# Altium PCB Stack_Rduino-SAMD_V2-PRO_2021-01-03_21-25-19.pcbdoc
Units mm, origin at the board's own origin, x right, y up, seen from the top; angles counter-clockwise.
Board outline 69.99 x 44.68 mm, 2 copper layers (Top Layer, Bottom Layer); 66 components, 87 nets, 315 pads, 109 vias.
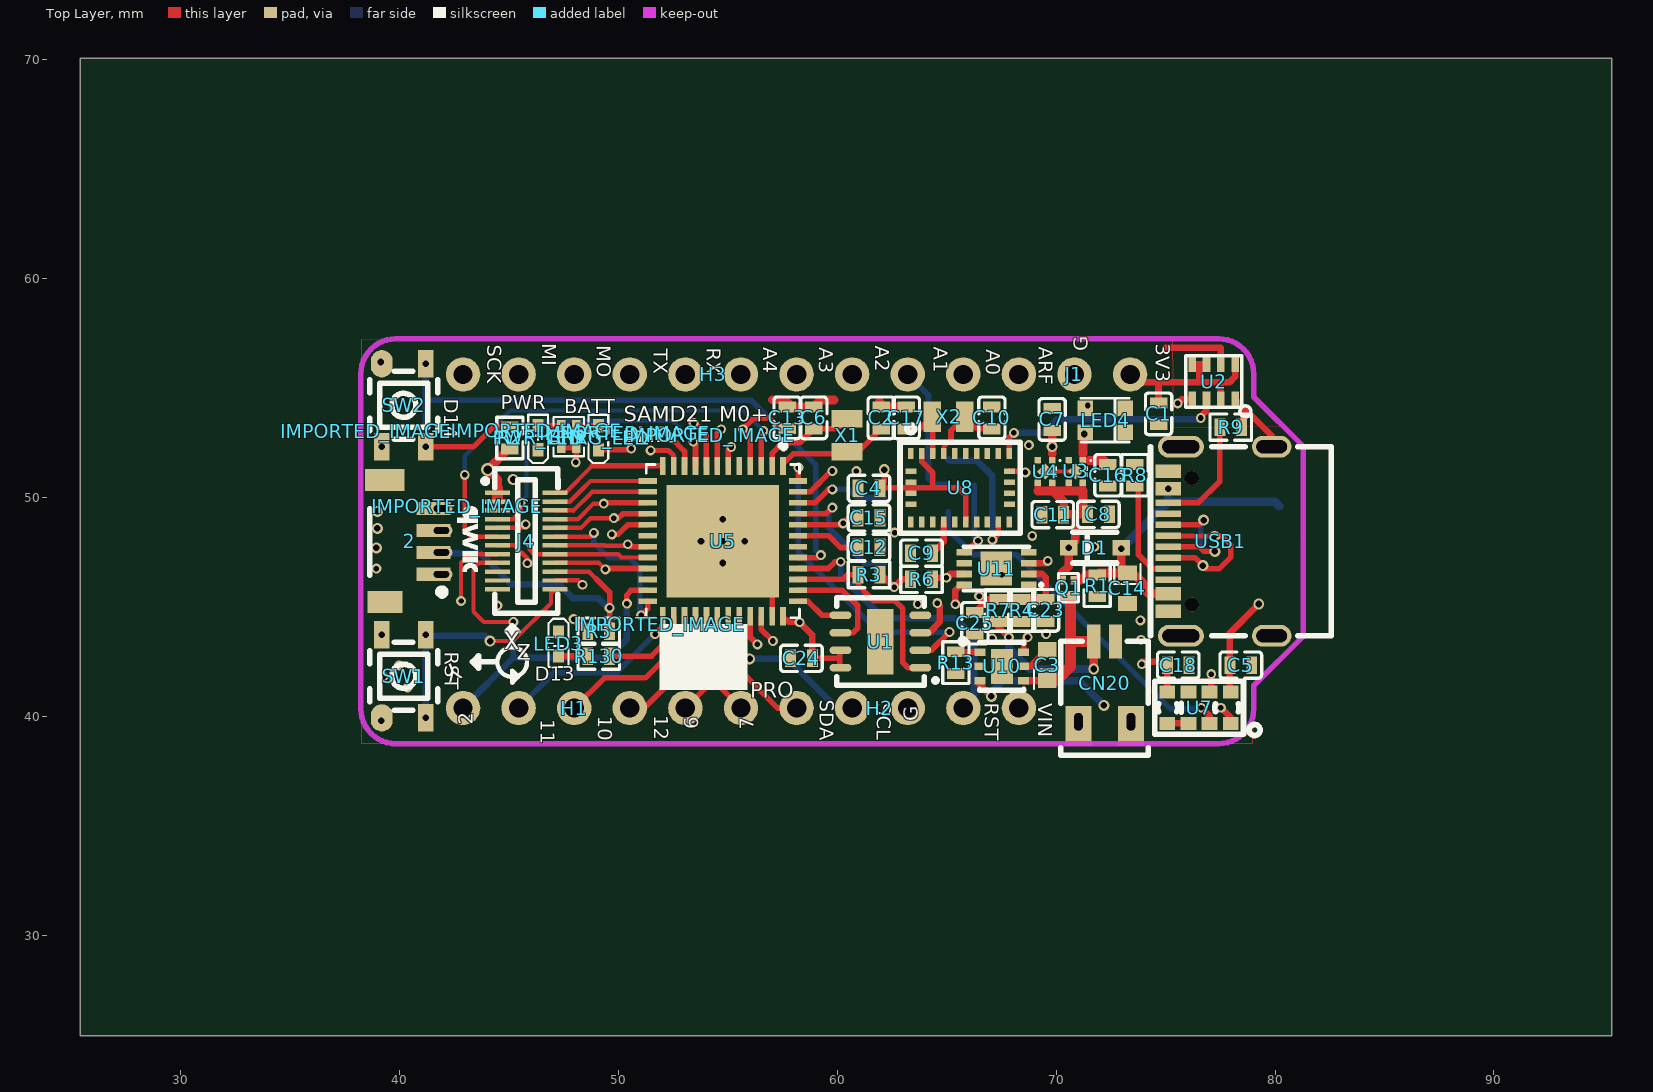
[diagram p0: Top Layer view]
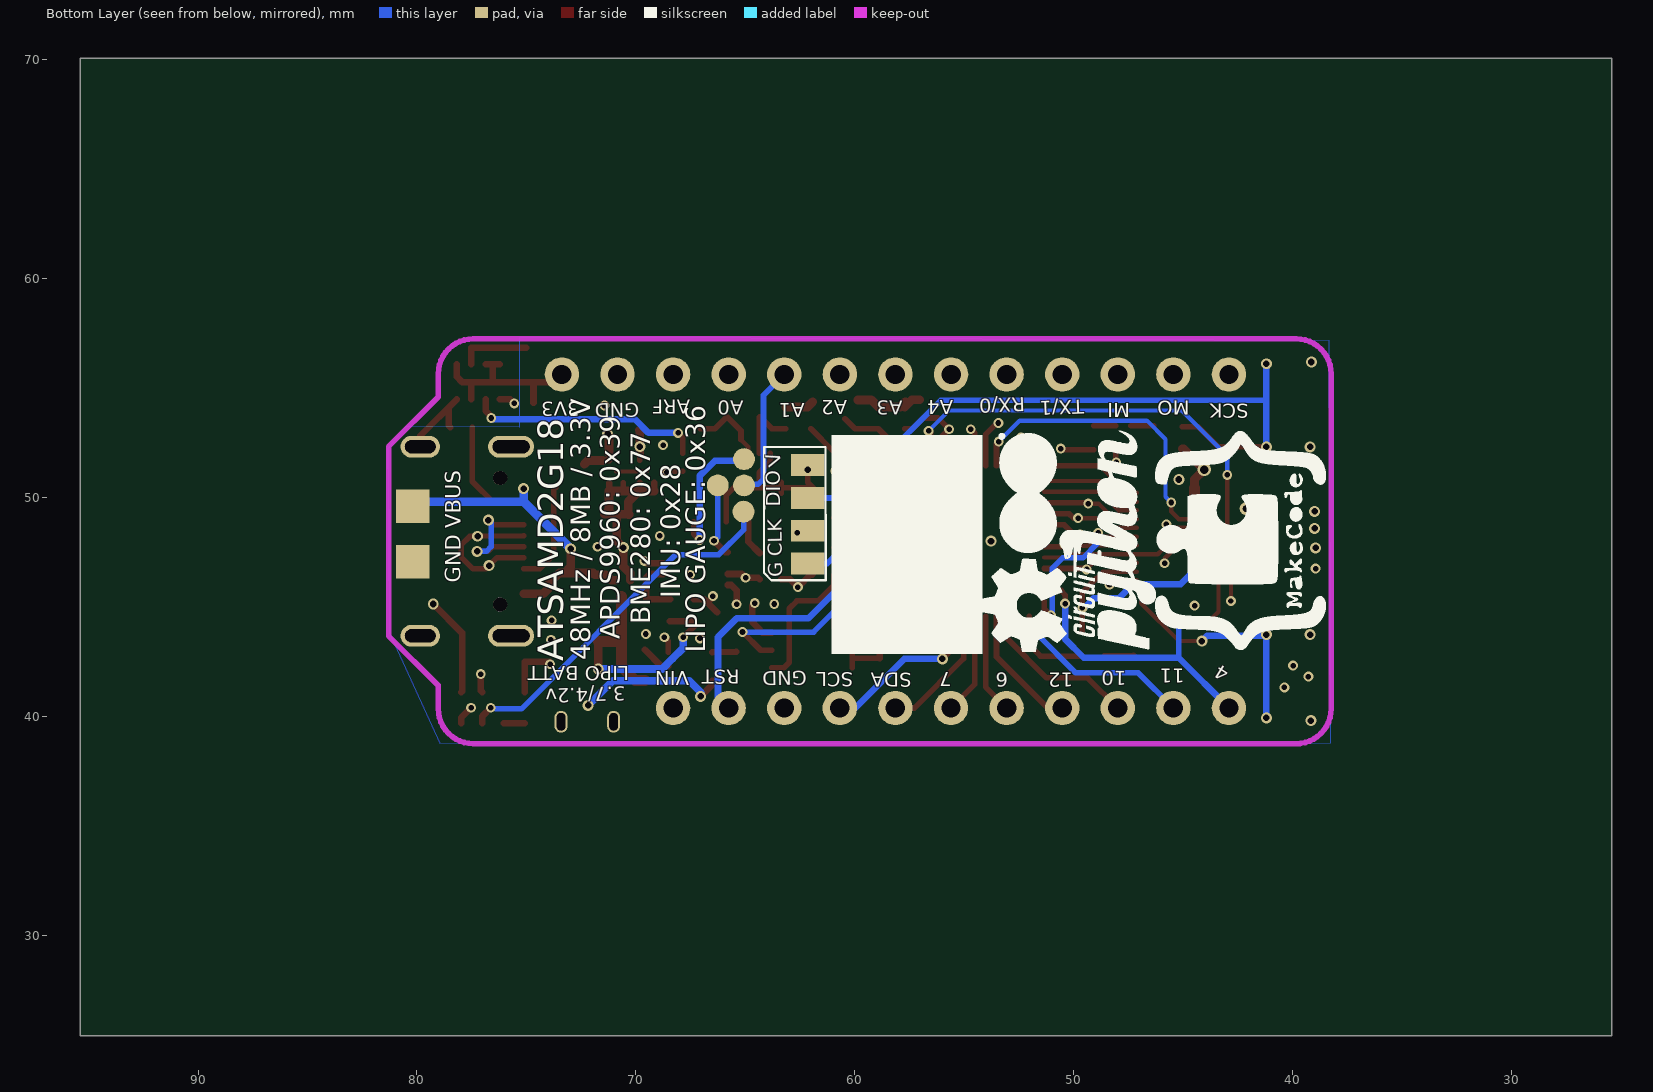
[diagram p1: Bottom Layer view, seen from below]

## Layer stack, top to bottom
Top Layer: signal copper (thickness not stored)
Dielectric: dielectric 0.32, FR-4, Dk 4.8
Bottom Layer: signal copper (thickness not stored)

## Board outline
95.394,25.4 25.4,25.4 25.4,70.076 95.394,70.076

## Components (designator, comment, footprint, x,y, rotation, side; value= is the part's Value field where it differs from the comment)
2 "JST_SH_4" JST_SH_4_SMD 40.237,48.109 r270 top
C1 "0.1uf" C0402 74.677,53.821 r270 top
C2 "22P" C0402 62.004,53.638 r270 top
C3 "10uF" C2012 69.587,42.341 r270 top
C4 "0.1uf" C0402 61.446,50.418 r0 top
C5 "1Uf" C0402 78.437,42.341 r0 top
C6 "22P" C0402 58.924,53.638 r90 top
C7 "1u" C0402 69.818,53.568 r90 top
C8 "1u" C0402 71.927,49.229 r0 top
C9 "0.1uf" C0402 63.847,47.461 r0 top
C10 "22P" C0402 67.064,53.638 r90 top
C11 "1u" C0402 69.845,49.217 r180 top
C12 "1u" C0402 61.447,47.714 r180 top
C13 "0.1u" C0402 57.707,53.639 r270 top
C14 "10uF" C2012 73.257,45.851 r90 top
C15 "10uf" C0402 61.447,49.064 r0 top
C16 "1u" C0402 72.362,51.016 r270 top
C17 "22P" C0402 63.154,53.638 r270 top
C18 "1Uf" C0402 75.577,42.341 r180 top
C23 "10Nf" C0402 69.517,44.841 r90 top
C24 "1uf" C0402 58.357,42.649 r180 top
C25 "1Uf" C0402 66.287,44.251 r270 top
CHRG_LED "Green" LED0402-RD 49.081,52.725 r90 top
CN20 "A1002WR-S-2P" CONN-SMD_A1002WR-S-2P 72.217,41.501 r0 top
D1 "B0540WS-7" "SOD-323 NARROW_L1.8-W1.3-LS2.5-RD" 71.769,47.706 r0 top
H1 "HDR-F-2.54_1x5" HDR-2.54_1X5 47.977,40.379 r180 top
H2 "HDR-F-2.54_1x6" HDR-2.54_1X6 61.949,40.379 r180 top
H3 "HDR-F-2.54_1x10" HDR-2.54_1X10 54.327,55.619 r0 top
IMPORTED_IMAGE "IMPORTED_IMAGE" IMPORTED_IMAGE 46.261,53.047 r0 top
IMPORTED_IMAGE "IMPORTED_IMAGE" IMPORTED_IMAGE 50.314,52.929 r0 top
IMPORTED_IMAGE "IMPORTED_IMAGE" IMPORTED_IMAGE 54.17,52.85 r0 top
IMPORTED_IMAGE "IMPORTED_IMAGE" IMPORTED_IMAGE 38.466,53.034 r0 top
IMPORTED_IMAGE "IMPORTED_IMAGE" IMPORTED_IMAGE 51.88,44.206 r0 top
IMPORTED_IMAGE "IMPORTED_IMAGE" IMPORTED_IMAGE 42.63,49.6 r0 top
J1 "HDR-M-2.54_1x3" HDR-M-2.54_1X3H 70.837,55.619 r0 top
J4 "DF40C-24DS-0.4V(51)" DF40C-24DS-0.4V(51) 45.789,48.008 r0 top
LED3 "BL-HB337A-AV-TRB" LED0402-RD 47.26,43.306 r270 top
LED4 "WS2812B-2020" WS2812B-2020 72.237,53.53 r0 top
PWR_LED "Red" LED0402-RD 46.325,52.73 r90 top
Q1 "LP0404N3T5G" SOT-883-3_L1.0-W0.6-BR 70.557,45.871 r90 top
R1 "100k" R0402 71.87,45.966 r90 top
R2 "10K" R0402 45.035,52.721 r90 top
R3 "10K" R0402 61.447,46.469 r0 top
R4 "150~180r" R0402 68.437,44.841 r270 top
R5 "10K" R0402 49.097,43.889 r0 top
R6 "10K" R0402 63.847,46.261 r180 top
R7 "1K" R0402 67.357,44.841 r270 top
R8 "5.1K" R0402 73.599,51.015 r90 top
R9 "5.1K" R0402 77.977,53.211 r180 top
R13 "2.2K" R0402 65.417,42.451 r270 top
R130 "1K" R0402 49.097,42.749 r180 top
RN1 "2k" RES-ARRAY-SMD_0402-4P-L1.0-W1.0-BL 47.725,52.781 r0 top
SW1 "K2-1177SW-D4DW-06-hany" KEY-SMD_K2-1177SW-HANY#1 40.187,41.829 r90 top
SW2 "K2-1177SW-D4DW-06-hany" KEY-SMD_K2-1177SW-HANY#2 40.187,54.209 r90 top
U1 "W25Q64JVIQ" "USON-8_L4.0-W4.0-P0.8-BL-EP - CUSTOM(4X3)" 61.969,43.418 r0 top
U2 "BME280" LGA-8_BME280 77.197,55.291 r270 top
U3 "NCP167AMX330TBG" DFN-4_L1.0-W1.0-P0.65-BL-EP 70.897,51.186 r180 top
U4 "NCP167AMX330TBG" DFN-4_L1.0-W1.0-P0.65-BL-EP 69.492,51.186 r180 top
U5 "ATSAMD21G18_QFN" QFN50P700X700X90-49N 54.771,48.004 r270 top
U7 "APDS-9960" SENSORS-SMD_APDS-9960 76.527,40.391 r270 top
U8 "BNO055" LGA-28_L5.2-W3.8-P0.50-BL 65.614,50.448 r270 top
U10 "LP4055QVF" TDFN-6_L2.0-W2.0-P0.65-TL-EP 67.517,42.281 r0 top
U11 "MAX17043" TDFN-8-EP-2MMX3MM 67.267,46.751 r180 top
USB1 "TYPE-C16PIN" USB-C-SMD_TYPE-C16PIN 77.487,47.999 r90 top
X1 "32.768KHz" FC--12M_L2.0-W1.2 60.444,52.848 r90 top
X2 "32.768KHz" FC--12M_L2.0-W1.2 65.084,53.688 r180 top

## Footprints (in the part's own frame and the unit in brackets; to place one, negate y for a bottom-side part, rotate by r counter-clockwise, add the part's x,y. Pads: shape width x height; smd on the part's side, far side on the other; paste and mask are expansions set on the pad)
C0402 [mm]
  rect 0.5x0.8 smd: 1(-0.5,0) 2(0.5,0)
  silkscreen extent -0.95,-0.6 0.95,0.6
C2012 [mm]
  rect 0.7x0.85 smd: 1(0.7,0) 2(-0.7,0)
  silkscreen extent 0.2,-0.6 1.1,0.6
CONN-SMD_A1002WR-S-2P [mm]
  rect 0.6x1.55 smd: 1(-0.498,1.924) 2(0.501,1.924)
  rect 1.199x1.798 smd: 3(1.201,-1.924)
  rect 1.201x1.798 smd: 4(-1.201,-1.924)
  silkscreen extent -2,-3.27 2,1.92
DF40C-24DS-0.4V(51) [mm]
  rect 1.14x0.2 smd: 1(-1.32,2.2) 2(1.32,2.2) 3(-1.32,1.8) 4(1.32,1.8) 5(-1.32,1.4) 6(1.32,1.4) 7(-1.32,1) 8(1.32,1) 9(-1.32,0.6) 10(1.32,0.6) 11(-1.32,0.2) 12(1.32,0.2) 13(-1.32,-0.2) 14(1.32,-0.2) 15(-1.32,-0.6) 16(1.32,-0.6) 17(-1.32,-1) 18(1.32,-1) 19(-1.32,-1.4) 20(1.32,-1.4) 21(-1.32,-1.8) 22(1.32,-1.8) 23(-1.32,-2.2) 24(1.32,-2.2)
  silkscreen extent -1.98,-3.3 1.45,3.3
DFN-4_L1.0-W1.0-P0.65-BL-EP [mm]
  rect 0.3x0.3 smd: 1(-0.325,-0.508) 2(0.325,-0.508) 3(0.325,0.508) 4(-0.325,0.508)
  rect 0.52x0.52 smd rot 135: 5(0,0)
  silkscreen extent -0.69,-0.51 0.5,0.21
FC--12M_L2.0-W1.2 [mm]
  rect 0.8x1.4 smd: 1(-0.75,0) 2(0.75,0)
HDR-2.54_1X5 [mil]
  round 62 hole 35: 1(-200,0) 2(-100,0) 3(0,0) 4(100,0) 5(200,0)
HDR-2.54_1X6 [mil]
  round 62 hole 35: 1(-250,0) 2(-150,0) 3(-50,0) 4(50,0) 5(150,0) 6(250,0)
HDR-2.54_1X10 [mil]
  round 62 hole 35: 1(-450,0) 2(-350,0) 3(-250,0) 4(-150,0) 5(-50,0) 6(50,0) 7(150,0) 8(250,0) 9(350,0) 10(450,0)
HDR-M-2.54_1X3H [mil]
  round 62 hole 35: 1(-100,0) 2(0,0) 3(100,0)
IMPORTED_IMAGE [mm]
JST_SH_4_SMD [mm]
  rect 0.6x1.55 smd: 1(1.62,1.315) 2(0.62,1.315) 3(-0.38,1.315) 4(-1.38,1.315)
  rect 1x1.8 smd: P$1(-2.68,-0.91)
  rect 1x1.6 smd: P$2(2.888,-0.91)
  silkscreen extent -1.38,-1.61 2.53,1.8
KEY-SMD_K2-1177SW-HANY#1 [mm]
  oval 1.249x1 smd: 1(-1.9,1.001)
  rect 1.25x0.7 smd: 2(1.9,1.001)
  rect 1.25x0.701 smd: 3(-1.9,-1) 4(1.9,-1)
  silkscreen extent -1.55,-1.55 1.55,1.55
KEY-SMD_K2-1177SW-HANY#2 [mm]
  rect 1.25x0.7 smd: 1(-1.9,1.001)
  oval 1.249x1 smd: 2(1.9,1.001)
  rect 1.25x0.701 smd: 3(-1.9,-1) 4(1.9,-1)
  silkscreen extent -1.55,-1.55 1.55,1.55
LED0402-RD [mm]
  rect 0.6x0.5 smd: 1(-0.55,0) 2(0.55,0)
  silkscreen extent -1.15,-0.45 1.05,0.45
LGA-8_BME280 [mil]
  rect 27.56x13.8 smd: 1(31.5,38.6) 2(31.5,13) 3(31.5,-13) 4(31.5,-38.6) 5(-31.5,-38.6) 6(-31.5,-13) 7(-31.5,13) 8(-31.5,38.6)
  silkscreen extent -46,-50 63,67
LGA-28_L5.2-W3.8-P0.50-BL [mm]
  rect 0.5x0.25 smd: 1(-1.563,-2.25) 6(1.563,-2.25) 7(1.563,-1.752) 8(1.563,-1.252) 9(1.563,-0.752) 10(1.563,-0.252) 11(1.563,0.248) 12(1.563,0.748) 13(1.563,1.248) 14(1.563,1.748) 15(1.563,2.248) 20(-1.563,2.248) 21(-1.563,1.748) 22(-1.563,1.248) 23(-1.563,0.748) 24(-1.563,0.248) 25(-1.563,-0.252) 26(-1.563,-0.752) 27(-1.563,-1.252) 28(-1.563,-1.752)
  rect 0.25x0.5 smd: 2(-0.749,-2.25) 3(-0.249,-2.25) 4(0.251,-2.25) 5(0.751,-2.25) 16(0.75,2.25) 17(0.25,2.25) 18(-0.25,2.25) 19(-0.75,2.25)
  silkscreen extent -2.87,-2.75 2.08,2.75
QFN50P700X700X90-49N [mm]
  rect 0.84x0.26 smd: 1(-3.435,2.75) 2(-3.435,2.25) 3(-3.435,1.75) 4(-3.435,1.25) 5(-3.435,0.75) 6(-3.435,0.25) 7(-3.435,-0.25) 8(-3.435,-0.75) 9(-3.435,-1.25) 10(-3.435,-1.75) 11(-3.435,-2.25) 12(-3.435,-2.75) 25(3.435,-2.75) 26(3.435,-2.25) 27(3.435,-1.75) 28(3.435,-1.25) 29(3.435,-0.75) 30(3.435,-0.25) 31(3.435,0.25) 32(3.435,0.75) 33(3.435,1.25) 34(3.435,1.75) 35(3.435,2.25) 36(3.435,2.75)
  rect 0.26x0.84 smd: 13(-2.75,-3.435) 14(-2.25,-3.435) 15(-1.75,-3.435) 16(-1.25,-3.435) 17(-0.75,-3.435) 18(-0.25,-3.435) 19(0.25,-3.435) 20(0.75,-3.435) 21(1.25,-3.435) 22(1.75,-3.435) 23(2.25,-3.435) 24(2.75,-3.435) 37(2.75,3.435) 38(2.25,3.435) 39(1.75,3.435) 40(1.25,3.435) 41(0.75,3.435) 42(0.25,3.435) 43(-0.25,3.435) 44(-0.75,3.435) 45(-1.25,3.435) 46(-1.75,3.435) 47(-2.25,3.435) 48(-2.75,3.435)
  rect 5.15x5.15 smd: 49(0,0)
  silkscreen extent -4.45,-3.5 3.5,3.5
R0402 [mm]
  rect 0.5x0.8 smd: 1(-0.5,0) 2(0.5,0)
  silkscreen extent -0.95,-0.6 0.95,0.6
RES-ARRAY-SMD_0402-4P-L1.0-W1.0-BL [mm]
  rect 0.389x0.5 smd: 1(-0.35,-0.5) 2(0.35,-0.5) 3(0.35,0.5) 4(-0.35,0.5)
  silkscreen extent -0.7,-0.9 0.7,0.9
SENSORS-SMD_APDS-9960 [mil]
  rect 23.6x28.3 smd: 1(28,57) 2(28,19) 3(28,-19) 4(28,-57) 5(-28,-57) 6(-28,-19) 7(-28,19) 8(-28,57)
  silkscreen extent -48,-80 50,110
"SOD-323 NARROW_L1.8-W1.3-LS2.5-RD" [mm]
  rect 0.8x0.7 smd: 1(-1.2,0) 2(1.2,0)
  silkscreen extent -1,-0.7 1,0.7
SOT-883-3_L1.0-W0.6-BR [mm]
  rect 0.4x0.25 smd: 1(0.35,-0.225) 2(0.35,0.225)
  rect 0.4x0.7 smd: 3(-0.35,0)
  silkscreen extent -0.65,-0.45 0.65,0.45
TDFN-6_L2.0-W2.0-P0.65-TL-EP [mm]
  rect 0.5x0.35 smd: 1(-1,0.65) 2(-1,0) 3(-1,-0.65) 4(1,-0.65) 5(1,0) 6(1,0.65)
  rect 1x1.6 smd: 7(0,0)
  silkscreen extent -1.9,-1.1 1,1.27
TDFN-8-EP-2MMX3MM [mil]
  rect 27.56x11.81 smd: 1(-58,29.52) 2(-58,9.82) 3(-58,-9.86) 4(-58,-29.53) 5(58,-29.53) 6(58,-9.86) 7(58,9.82) 8(58,29.52)
  rect 57.09x61.42 smd: 9(-0.03,0)
  silkscreen extent -81,-39 59,39
USB-C-SMD_TYPE-C16PIN [mm]
  oval 1x2.099 hole 0.6 slot 1.7 at 90 deg: 1(-4.32,1.787) 2(4.32,1.787)
  oval 1x1.799 hole 0.6 slot 1.4 at 90 deg copper offset 0,0: 3(-4.32,-2.362) 4(4.32,-2.362)
  rect 0.6x1.15 smd: A1B12(-3.2,2.362) A4B9(-2.4,2.362) B1A12(3.2,2.362) B4A9(2.4,2.362)
  rect 0.3x1.15 smd: A5(-1.25,2.362) A6(-0.25,2.362) A7(0.25,2.362) A8(-1.75,2.362) B5(1.75,2.362) B6(0.75,2.362) B7(-0.75,2.362) B8(1.25,2.362)
  round 0.65 hole 0.65 unplated: ""(-2.89,1.288) ""(2.89,1.288)
  silkscreen extent -4.32,-5.08 4.32,3.17
"USON-8_L4.0-W4.0-P0.8-BL-EP - CUSTOM(4X3)" [mm]
  oval 0.996x0.35 smd: 1(1.825,-1.2) 2(1.825,-0.4) 3(1.825,0.4) 4(1.825,1.2) 5(-1.825,1.2) 6(-1.825,0.4) 7(-1.825,-0.4) 8(-1.825,-1.2)
  rect 1.2x3 smd: 9(-0.005,-0.006)
  silkscreen extent -2,-2 2.61,2
WS2812B-2020 [mm]
  rect 0.7x0.7 smd: 1(0.915,-0.55) 2(0.915,0.55) 3(-0.915,0.55) 4(-0.915,-0.55)
  silkscreen extent -1.1,-1 1.1,1

## Free pads (board coordinates)
  rect 1.524x1 smd far side: 1(62.14,46.976) 1(62.14,49.976) 1(62.14,51.476) 1(62.14,48.476)
  round 1 smd far side: 1(65.057,50.551) 1(65.057,51.751) 1(65.077,49.351) 1(66.257,50.551)
  rect 1.524x1.524 smd far side: 1(80.195,47.061) 1(80.195,49.601)
  oval 0.998x0.6 hole 0.3 slot 0.7 at 0 deg: 3(41.91,49.489) 4(41.91,48.489) 5(41.91,47.489) 6(41.91,46.489)
  oval 0.6x0.998 hole 0.4 slot 0.8 at 90 deg: 3(71.016,39.751) 3(73.417,39.751)

## Via types
v1: diameter 0.45, hole 0.254, Top Layer to Bottom Layer, 57 vias
v2: diameter 0.5, hole 0.3, Top Layer to Bottom Layer, 33 vias
v3: diameter 0.45, hole 0.25, Top Layer to Bottom Layer, 18 vias
v4: diameter 0.6, hole 0.4, Top Layer to Bottom Layer, 1 vias

## Nets (pads, with @x,y where several pads share a name; then routed paths per layer and width w, separated by ;. In a path a pad name is that pad's centre, name@x,y a point inside that pad or via, vN(x,y) a via of type N, cw(c..) or ccw(c..) an arc to the next point about the centre after c; other vN are vias at no path point)
3V3: 2.3 C4.2 C7.1 C15.1 C18.2 C24.1 J4.1 J4.3 J4.5 pad.1@62.14,51.476 pad.4 R2.1 R3.2 R5.1 R6.2 RN1.1 RN1.2 U1.3 U1.7 U1.8 U4.1 U5.6 U5.17 U5.36 U5.44 U7.5 U8.3 U8.4 U8.11 U8.28 | length 32.8
  Top Layer w0.254: J4.5 J4.3 ; RN1.1 RN1.2 48.075,51.631 v1(48.045,51.601) ; v1(49.697,48.309) 49.982,48.309 50.142,48.469 50.426,48.754 U5.17@51.336,48.754 ; U5.6 55.02,52.174 v1(55.151,52.305) ; U5.36 57.791,44.299 v1(58.276,44.299) ; U5.44@58.205,48.755 60.209,48.755 v1(60.266,48.812) 60.519,49.064 C15.1 ; C24.1 60.086,42.649 60.116,42.679 ; U1.8@60.116,42.219 U1.7@60.116,43.019 ; C4.2@61.873,50.419 61.917,50.449 64.363,50.449 ; C4.2@61.917,50.462 62.144,50.688 v2(62.144,51.268) ; U8.4 U8.3 ; U8.28@63.862,52.011 63.862,51.63 64.363,51.13 64.363,50.449 ; U8.11 65.862,50.104 65.517,50.449 65.111,50.449 64.363,50.449 ; U4.1 69.818,51.994
  Top Layer w0.3: v1(47.947,44.439) 48.497,43.889 R5.1@48.597,43.889 ; v1@58.276,44.298 58.857,43.717 C24.1 ; R3.2 62.027,46.469 v1(62.595,45.901) 62.955,46.261 R6.2 ; U1.3 64.215,43.817 64.688,44.33 64.688,45.051 v1(64.567,45.171) ; v1(73.917,42.381) 73.917,42.501 75.078,42.501 75.078,41.726 75.078,41.102 U7.5
  Top Layer w0.4: J4.1 44.469,50.828 v4(44.026,51.272) 44.975,52.221 R2.1 ; 69.818,51.994 69.818,52.414 69.818,53.042 69.844,53.068 C7.1@69.818,53.042
  Top Layer w0.5: J4.3 44.469,49.931 44.469,50.43
  other v2: 69.817,52.321
3V3OUT: C1.1 C5.1 C16.1 J1.3 LED4.4 U2.2 U2.5 U2.6 U2.8 U3.1 U7.8 | length 34.1
  Top Layer w0.3: U3.1 71.522,51.694 ; U3.1@71.223,51.694 71.223,51.994 ; J1.3 73.725,55.271 76.477,55.271 77.937,55.271 78.178,55.511 U2.8 ; C1.1@74.677,54.321 74.677,55.271 ; U2.5 U2.6 ; 76.219,55.271 76.546,55.271 ; 76.537,55.271 76.537,56.091 ; 76.868,55.271 77.528,55.271 U2.2 ; U7.8 77.938,41.14 C5.1 77.938,43.811 v2(79.257,45.131)
  Top Layer w0.4: 71.223,51.994 71.223,52.837 v2(71.287,52.901) ; 71.522,51.694 72.184,51.694 C16.1 C16.1@72.181,51.697 ; J1.3@73.195,55.437 J1.3
  Mid-Layer 2 w0.4: v2(71.287,52.901) 73.377,52.901 73.377,52.685 ; J1.3 73.377,48.401 75.637,46.141 78.247,46.141 v2(79.257,45.131)
A0: H3.10 J4.11 U5.3 | length 32.6
  Top Layer w0.2: 42.977,48.579 42.977,48.501 43.269,48.208 J4.11 ; 42.977,48.58 v3(42.977,51.029)
  Top Layer w0.254: U5.3 56.52,52.938 v1(56.624,53.042)
  Mid-Layer 2 w0.254: v1(56.624,53.042) 64.625,53.042 65.757,54.174 H3.10
  Bottom Layer w0.2: v3@42.977,51.03 42.975,51.891 45.055,53.972 55.695,53.972 v1(56.624,53.042)
A1: H3.9 pad.1@65.057,50.551 U5.7 | length 17.9
  Top Layer w0.254: U5.7 54.52,52.945 v1(54.694,53.118)
  Mid-Layer 1 w0.254: v1@54.695,53.117 55.279,53.704 62.086,53.704 63.216,54.834 H3.9@63.216,55.619
  Bottom Layer w0.254: H3.9 64.167,54.669 64.167,50.851 64.417,50.601 65.008,50.601 pad.1@65.058,50.551
A2: H3.8 U5.8 | length 10.6
  Top Layer w0.254: v1(53.436,53.402) 53.5,53.402 54.02,52.882 U5.8
  Mid-Layer 2 w0.254: v1(53.436,53.402) 53.762,53.728 59.137,53.728 60.677,55.268 H3.8
A3: H3.7 J4.7 U5.9 | length 20.3
  Top Layer w0.2: J4.7 45.185,49.009 45.537,49.36 v1(45.537,49.771)
  Top Layer w0.254: v1(53.416,52.552) 53.52,52.447 U5.9
  Mid-Layer 1 w0.254: v1(53.416,52.552) 54.052,53.187 54.067,53.502 54.801,54.236 56.754,54.236 H3.7
  Bottom Layer w0.2: v1(45.537,49.771) 45.796,50.03 45.796,50.322 45.796,52.662 46.646,53.512 52.456,53.512 v1(53.416,52.552)
A4: H3.6 U5.10 | length 6.3
  Top Layer w0.254: v1(52.396,52.732) 53.02,52.107 U5.10
  Mid-Layer 2 w0.254: v1(52.396,52.732) 52.396,53.268 54.747,55.619 H3.6
A5: J4.9 U5.47 | length 18.4
  Top Layer w0.2: J4.9 45.595,48.608 v3(45.757,48.771)
  Top Layer w0.254: U5.47 58.764,50.255 59.719,51.209 v1(59.777,51.209)
  Mid-Layer 2 w0.254: v3(45.757,48.771) 47.735,50.749 59.317,50.749 v1(59.777,51.209)
AREF: C13.2 J1.1 U5.4 | length 18.5
  Top Layer w0.254: v1(55.685,53.118) 56.02,52.783 U5.4 ; v1(55.685,53.118) 56.196,53.63 56.876,53.63 57.367,53.139 C13.2
  Mid-Layer 1 w0.254: v1(55.685,53.118) 56.447,52.358 57.131,52.358 57.915,53.142 65.82,53.142 J1.1
BATT+: C3.1 CN20.1 Q1.3 R4.2 R7.2 U10.4 | length 14.8
  Top Layer w0.3: v1(67.837,43.611) 67.357,44.091 R7.2 R4.2
  Top Layer w0.35: U10.4 69.577,41.631 C3.1
  Top Layer w0.4: v2@71.718,42.121 CN20.1
  Top Layer w0.5: C3.1 70.027,41.641 70.657,42.271 Q1.3@70.657,45.471 ; 70.657,43.354 70.657,43.426 CN20.1
  Bottom Layer w0.35: v1(67.837,43.611) 67.837,43.121 68.328,42.631 68.797,42.161 v2@71.718,42.161
  other v2: 71.717,42.161
CHRG_LED_2: CHRG_LED.2 RN1.3 | length 1
  Top Layer w0.254: RN1.3@48.076,53.281 CHRG_LED.2
D0/RX: H3.5 J4.10 U5.16 | length 12.9
  Top Layer w0.2: J4.10 48.286,48.608 48.667,48.989 48.732,49.054 v1(49.792,49.054)
  Top Layer w0.254: v1(49.792,49.054) 49.996,49.054 50.198,49.257 U5.16@51.336,49.257
  Mid-Layer 1 w0.254: v1(49.792,49.054) 49.947,49.209 49.947,53.373 50.97,54.396 51.834,54.396 H3.5
D1/TX: H3.4 J4.8 U5.15 | length 10.9
  Top Layer w0.2: J4.8 48.146,49.009 48.856,49.719 v1(49.325,49.719)
  Top Layer w0.254: v1(49.325,49.719) 49.361,49.754 U5.15
  Mid-Layer 1 w0.254: v1(49.325,49.719) 49.325,54.427 H3.4
D2: J4.4 U5.13 | length 4.8
  Top Layer w0.2: J4.4 47.776,49.809 48.527,50.559 ; 48.42,50.452 48.721,50.754 U5.13
D3: J4.6 U5.14 | length 4.6
  Top Layer w0.2: J4.6 47.938,49.409 47.947,49.399 48.802,50.254 U5.14
D4: H1.5 J4.17 U5.23 | length 18.9
  Top Layer w0.2: J4.17 43.625,47.009 43.377,46.761 43.377,44.781 43.847,44.311 v3(45.198,44.311)
  Top Layer w0.254: v1(50.385,45.151) 50.385,45.532 50.57,45.755 U5.23
  Bottom Layer w0.254: 45.024,42.506 45.198,42.68 v3(45.198,44.311)
  Bottom Layer w0.3: H1.5 45.197,42.679 49.537,42.679 50.385,43.528 v1(50.385,45.151)
D5: J4.12 U5.24 | length 7.8
  Top Layer w0.2: J4.12 48.706,48.208 v1(48.877,48.379)
  Top Layer w0.254: v1(51.036,44.609) 51.335,44.908 U5.24
  Bottom Layer w0.254: v1(48.877,48.379) 48.877,47.929 49.567,47.239 50.496,47.239 50.966,46.77 50.966,44.68 v1(51.036,44.609)
D6: H1.1 U5.29 | length 4.6
  Top Layer w0.254: H1.1 54.02,41.343 U5.29
D7: H2.6 U5.30 | length 4.6
  Top Layer w0.254: U5.30 54.52,41.458 H2.6
D8: LED4.3 U5.11 | length 22.8
  Top Layer w0.23: v3(51.466,52.149) 52.287,52.149 52.52,51.916 U5.11
  Mid-Layer 1 w0.254: v3(51.466,52.149) 51.916,51.699 57.644,51.699 57.896,51.952 58.474,52.529 66.705,52.529 68.157,53.981 70.987,53.981 71.207,54.201 v1(71.438,54.201)
D9: J4.2 U5.12 | length 5.4
  Top Layer w0.2: J4.2 47.563,50.208 48.796,51.441
  Top Layer w0.254: 48.796,51.441 U5.12@52.019,51.441
D10: H1.3 U5.27 | length 7.4
  Top Layer w0.254: H1.3 49.357,41.759 51.234,41.759 53.02,43.545 U5.27
D11: H1.4 J4.15 U5.25 | length 19.8
  Top Layer w0.2: v3@42.807,45.139 42.807,46.76 42.807,47.009 43.206,47.409 J4.15 ; 43.446,47.399 43.455,47.409 J4.15 ; J4.15@43.947,47.399 43.956,47.409 J4.15
  Top Layer w0.254: v1@51.675,43.759 52.02,44.104 U5.25@52.02,44.57
  Mid-Layer 2 w0.254: v3(42.807,45.269) 42.807,43.709 45.437,41.079 H1.4
  Bottom Layer w0.254: H1.4@45.436,40.379 47.052,41.992 49.908,41.992 v1(51.675,43.759)
D12: H1.2 J4.13 U5.28 | length 16.2
  Top Layer w0.2: J4.13 45.25,47.809 45.837,47.221 v3(45.837,46.991)
  Top Layer w0.254: H1.2 51.177,40.379 53.521,42.723 U5.28
  Mid-Layer 2 w0.254: v3(45.837,46.991) 45.837,45.02 50.478,40.379 H1.2@50.516,40.379
D+: U5.34 USB1.A6 USB1.B6 | length 29.6
  Top Layer w0.254: U5.34 56.52,43.977 v1(57.056,43.441) ; USB1.A6 76.549,47.749 76.762,47.536 v2(77.25,47.536) ; USB1.B6 76.523,48.749 v2(76.74,48.966)
  Mid-Layer 1 w0.254: v1(57.056,43.441) 57.235,43.261 65.706,43.261 66.069,42.946 69.341,42.946 70.05,42.946 75.975,48.872
  Mid-Layer 1 w0.3: 75.975,48.872 76.07,48.966 v2(76.74,48.966)
  Bottom Layer w0.254: v2(76.74,48.966) 76.61,48.836 76.61,47.756 76.83,47.536 v2(77.25,47.536)
D-: U5.33 USB1.A7 USB1.B7 | length 32
  Top Layer w0.254: U5.33 56.02,43.613 v1(56.345,43.288) ; USB1.B7 76.337,47.249 v2(76.7,46.886) 76.85,46.736 77.44,46.736 77.98,47.276 77.98,47.826 77.579,48.227 v2(77.23,48.227) USB1.A7@75.125,48.25
  Mid-Layer 1 w0.254: v2@76.645,46.831 v2(76.7,46.886)
  Mid-Layer 1 w0.3: v1@56.346,43.289 56.913,42.72 65.475,42.72 65.81,42.387 69.313,42.387 70.41,42.387 76.252,48.227 v2(77.23,48.227)
FLASH-CS: R3.1 U1.1 U5.39 | length 9.1
  Top Layer w0.254: U5.39 59.924,46.254 60.241,46.254 60.457,46.469 R3.1 ; R3.1 60.948,46.011 61.425,45.511 61.665,45.271 62.645,45.271 62.99,44.926 62.99,42.466 63.239,42.219 U1.1@63.793,42.219
FLASH-MISO: U1.2 U5.48 | length 14.6
  Top Layer w0.254: U5.48 58.225,50.774 v1(58.225,51.366) ; U1.2 64.293,43.018 v1(65.125,43.851)
  Bottom Layer w0.254: v1(58.225,51.366) 58.225,47.501 61.875,43.851 v1(65.125,43.851)
FLASH-MOSI: U1.5 U5.37 | length 2.3
  Top Layer w0.254: U5.37 58.662,45.254 59.297,44.619 60.117,44.619 U1.5@60.003,44.619
FLASH-SCK: U1.6 U5.38 | length 4.9
  Top Layer w0.254: U5.38 60.231,45.754 60.935,45.051 60.935,44.03 60.723,43.818 U1.6
GND: 2.4 C1.2 C2.1 C3.2 C4.1 C5.2 C6.2 C7.2 C8.2 C9.1 C10.2 C11.2 C12.1 C13.1 C14.2 C15.2 C16.2 C17.1 C18.1 C23.1 C24.2 C25.2 CN20.2 CN20.3 CN20.4 H2.3 J1.2 J4.19 J4.21 J4.23 LED3.1 LED4.2 pad.1@62.14,48.476 pad.1@80.195,47.061 pad.3 PWR_LED.1 R1.1 R8.2 R9.1 R13.2 SW1.1 SW1.2 SW2.1 SW2.2 U1.4 U2.1 U2.7 U3.2 U3.5 U4.2 U4.5 U5.5 U5.18 U5.35 U5.42 U5.49 U7.6 U8.2 U8.5 U8.6 U8.10 U8.15 U8.16 U8.17 U8.18 U8.25 U10.5 U10.7 U11.1 U11.4 U11.6 U11.9 USB1.1 USB1.2 USB1.3 USB1.4 USB1.A1B12 USB1.B1A12 | length 18.8
  Top Layer w0.2: U4.5 70.087,51.186 U3.5
  Top Layer w0.254: U5.49@54.77,48.005 57.02,45.755 U5.35
  Top Layer w0.3: U10.5 68.827,42.281 C3.2 ; 74.997,56.841 77.528,56.841 U2.7 ; U2.1 79.849,52.82 USB1.4 ; R9.1 78.541,53.275 78.541,54.127
  Top Layer w0.4: 57.044,54.468 57.378,54.468 C13.1 ; C13.1@57.682,54.378 57.922,54.138 C6.2 59.244,54.458 59.854,54.458 ; C2.1@61.912,54.378 62.152,54.138 C17.1
  other v1: 67.067,43.561 69.537,43.761 63.677,45.131 67.517,46.471 71.75,47.746 68.91,48.246 62.617,48.391 60.87,51.206 68.757,52.391
  other v2: 39.157,39.799 39.187,43.729 54.77,47.004 38.94,47.696 53.77,48.004 54.77,48.004 55.77,48.004 38.98,48.586 54.77,49.004 38.98,49.366 45.185,50.821 39.187,52.309 39.137,56.189
  other v3: 40.367,41.319 39.27,41.816 39.97,42.316 73.877,43.501 73.847,44.381 44.468,45.061 38.94,46.746
LED4_1: LED4.1
MISO: H3.2 J4.18 U5.21 | length 15.5
  Top Layer w0.2: J4.18 49.108,47.009 v1(49.405,46.711)
  Top Layer w0.254: v1(49.405,46.711) 49.449,46.755 U5.21
  Mid-Layer 1 w0.254: H3.2 45.437,53.573 45.797,53.214 46.437,52.574 ; 46.438,52.575 47.477,51.534 47.477,47.579 48.096,46.959 49.157,46.959 v1(49.405,46.711)
MOSI: H3.3 J4.14 U5.19 | length 15.3
  Top Layer w0.2: J4.14 49.366,47.809 49.375,47.8 50.366,47.8 v1(50.427,47.86)
  Top Layer w0.254: v1(50.427,47.86) 50.533,47.755 U5.19
  Mid-Layer 1 w0.254: H3.3 48.785,54.811 48.785,50.241 47.997,49.452 47.997,47.968 48.368,47.6 50.166,47.6 v1@50.427,47.859
PA13: U5.22
PWR_LED_2: PWR_LED.2 RN1.4 | length 1
  Top Layer w0.254: PWR_LED.2@46.325,53.281 RN1.4
R130_1: R130.1 U5.26 | length 4.2
  Top Layer w0.254: R130.1@49.597,42.75 51.512,42.75 52.52,43.757 U5.26
R130_2: LED3.2 R130.2 | length 1.3
  Top Layer w0.3: LED3.2@47.261,42.756 R130.2@48.597,42.75
RST: H2.2 J4.24 SW1.3 SW1.4 U5.40 | length 48
  Top Layer w0.2: v2(44.137,43.439) 45.187,43.439 46.917,45.169 46.917,45.616 J4.24
  Top Layer w0.254: U5.40 59.585,46.755 59.889,47.059 v1(60.156,47.059)
  Mid-Layer 1 w0.254: v2(44.137,43.439) 45.575,42.001 65.075,42.001 65.759,41.317 H2.2
  Bottom Layer w0.254: v1(60.156,47.059) 60.156,46.439 60.476,46.12
  Bottom Layer w0.3: v2(41.187,39.929) v2(41.187,43.729) 41.227,43.689 43.887,43.689 v2(44.137,43.439) ; 60.476,46.12 62.124,44.471 65.395,44.471 66.245,43.621 66.245,40.866 H2.2 ; H2.2@65.716,40.421 H2.2@65.76,40.378
S$22: 
S$29: 
S$31: 
S$33: 
S$89916: 
S$89918: 
S$134937: 
S$134940: 
S$134942: 
S$142615: 
S$142617: 
S$155749: 
SCK: H3.1 J4.16 U5.20 | length 15.6
  Top Layer w0.2: v1(45.936,47.952) 45.936,47.622 46.149,47.409 J4.16 49.986,47.409 50.134,47.26 U5.20
  Mid-Layer 1 w0.254: H3.1@42.896,55.619 42.896,55.35 45.487,52.759 ; 45.487,52.759 46.926,51.319 46.926,48.942 v1(45.936,47.952)
SCL: 2.1 H2.4 J4.22 pad.6 R6.1 U2.4 U5.32 U7.7 U8.19 U11.7 | length 69.7
  Top Layer w0.2: J4.22 48.159,46.208 v1(48.357,46.011)
  Top Layer w0.254: U5.32@55.52,44.57 55.52,43.097 v2(55.989,42.628) ; U8.19 68.544,51.198 v1(68.594,51.148)
  Top Layer w0.3: R6.1 64.418,46.331 v1(64.984,46.331) 65.154,46.501 U11.7 ; v1(75.557,54.301) 75.747,54.491 U2.4 ; U7.7 77.087,41.18 v1(77.087,41.931)
  Mid-Layer 1 w0.3: pad.6@42.04,46.489 42.519,46.011 v1(48.357,46.011) ; v1@48.356,46.012 51.889,46.012 55.305,42.629 v2@55.991,42.629 ; v1(68.594,51.148) 71.542,51.148 ; v1(75.557,54.301) 74.695,54.301 74.165,53.771 71.542,51.148 ; v1@77.088,41.93 77.088,45.852 77.936,46.7 77.936,49.012 77.257,49.691 72.998,49.691 71.542,51.148
  Mid-Layer 2 w0.3: H2.4 61.526,40.379 63.287,42.141 64.377,42.141 68.207,45.971 68.207,50.762 v1(68.594,51.148) ; v1(64.984,46.331) 66.587,46.331 67.577,45.341
  Bottom Layer w0.3: v2(55.989,42.628) 57.728,42.628 59.977,40.379 H2.4
SDA: 2.2 H2.5 J4.20 pad.5 R5.2 U2.3 U5.31 U7.1 U8.20 U11.8 | length 76.3
  Top Layer w0.2: J4.20 48.657,46.608 48.979,46.286
  Top Layer w0.254: 48.979,46.286 49.597,45.668 v1(49.597,44.954) R5.2 ; U5.31@55.02,44.57 55.02,42.632 57.273,40.379 H2.5 ; U8.20 67.862,52.746 v1(68.067,52.951)
  Top Layer w0.3: v1(65.397,45.121) 65.397,45.761 65.637,46.001 U11.8 ; v1(76.607,53.631) 76.607,53.701 76.867,53.961 U2.3 ; v1(77.527,40.391) 77.975,39.943 U7.1
  Mid-Layer 1 w0.3: v1(65.397,45.121) 65.397,45.489 67.877,47.969 67.877,52.761 v1(68.067,52.951) ; v1(76.607,53.631) 77.307,52.931 77.307,50.441 78.497,49.251 78.497,46.451 77.667,45.621 77.667,40.531 v1(77.527,40.391)
  Mid-Layer 2 w0.3: v1(49.597,44.954) 52.571,41.979 56.539,41.979 ; H2.5 56.539,41.979 ; v1(65.397,45.121) 65.397,45.011 65.057,44.671 62.365,41.979 56.539,41.979
  Bottom Layer w0.3: pad.5@42.04,47.489 42.083,47.446 43.7,47.446 45.11,46.036 47.28,46.036 47.915,45.401 49.067,45.401 49.513,44.954 v1(49.597,44.954) ; v1(68.067,52.951) 69.417,52.951 70.037,53.571 73.418,53.571 ; 73.22,53.571 76.547,53.571 v1(76.607,53.631)
SW_CLK: pad.1@62.14,46.976 U5.45 | length 5.9
  Top Layer w0.254: U5.45@58.206,49.254 59.492,49.254 v1(59.777,49.539)
  Bottom Layer w0.254: v1(59.777,49.539) 59.607,49.37 59.607,48.621 61.252,46.976 pad.1@62.14,46.976
SW_DIO: pad.1@62.14,49.976 U5.46 | length 4.4
  Top Layer w0.254: U5.46 58.976,49.754 59.591,50.369 v1(59.777,50.369)
  Bottom Layer w0.254: v1(59.777,50.369) 60.527,50.369 60.92,49.976 pad.1@62.14,49.976
SWITCH: R2.2 SW2.3 SW2.4 U5.41 | length 32.5
  Top Layer w0.254: SW2.3 43.383,52.309 44.295,53.221 R2.2 ; U5.41 59.112,47.254 v3@59.307,47.449
  Bottom Layer w0.254: 41.188,54.442 56.064,54.442 59.007,51.499 59.007,47.609 v3(59.247,47.369)
  Bottom Layer w0.3: v2(41.187,52.309) v2(41.187,56.109)
U5_1: C2.2 U5.1 X1.1 | length 5.2
  Top Layer w0.254: U5.1 57.521,51.533 57.977,51.989 60.335,51.989 X1.1 60.964,52.098 C2.2@62.004,53.138
U5_2: C6.1 U5.2 X1.2 | length 4.7
  Top Layer w0.254: U5.2 57.021,52.013 57.507,52.499 58.285,52.499 58.924,53.138 59.984,53.138 X1.2
U5_43: C12.2 U5.43 | length 3
  Top Layer w0.254: U5.43@58.205,48.255 59.609,48.255 60.149,47.714 C12.2
U7_2: pad.1@65.077,49.351 U7.2 | length 16.4
  Top Layer w0.3: v1(76.627,40.391) 77.01,40.009 U7.2
  Bottom Layer w0.254: pad.1@65.077,49.351 65.077,48.521 66.217,47.381 68.187,47.381 75.227,40.341 76.397,40.341
U7_3: U7.3 U7.4 | length 1
  Top Layer w0.3: U7.4 U7.3
U8_1: U8.1
U8_7: U8.7
U8_8: U8.8
U8_9: C9.2 U8.9 | length 1.6
  Top Layer w0.3: C9.2 64.862,47.975 U8.9
U8_12: U8.12
U8_13: U8.13
U8_14: pad.1@65.057,51.751 U8.14 | length 6.2
  Top Layer w0.254: v1(67.087,48.061) 67.362,48.335 U8.14
  Bottom Layer w0.3: pad.1@65.058,51.751 65.138,51.671 66.137,51.671 66.397,51.671 67.088,50.98 67.088,50.721 v1(67.087,48.061)
U8_21: U8.21
U8_22: U8.22
U8_23: U8.23
U8_24: U8.24
U8_26: C10.1 U8.26 X2.1 | length 3.5
  Top Layer w0.2: U8.26 64.862,52.306 65.194,52.638
  Top Layer w0.254: 65.194,52.638 65.194,53.048 X2.1 66.384,53.138 C10.1@67.064,53.138
U8_27: C17.2 U8.27 X2.2 | length 3.1
  Top Layer w0.254: C17.2 63.784,53.138 X2.2 64.362,53.66 U8.27
U10_1: R13.1 U10.1 | length 1.1
  Top Layer w0.3: R13.1 U10.1
U10_2: U10.2
U10_6: CHRG_LED.1 U10.6 | length 26.6
  Top Layer w0.254: CHRG_LED.1 50.53,52.175 v3(50.585,52.231) ; U10.6 68.518,43.431 v3(68.697,43.611)
  Mid-Layer 1 w0.3: v3(50.585,52.231) 51.117,51.699 51.117,47.741 53.027,45.831 59.887,45.831 61.247,44.471 63.092,44.471 ; 62.737,44.471 67.837,44.471 v3(68.697,43.611)
U11_2: C23.2 R4.1 U11.2 | length 2.9
  Top Layer w0.3: R4.1 C23.2 ; U11.2@68.742,46.502 69.366,46.502 69.526,46.342 C23.2
U11_3: C25.1 R7.1 U11.3 | length 6.4
  Top Layer w0.3: C25.1 66.877,45.341 R7.1 ; v3(66.477,45.491) 66.477,45.456 66.735,45.199 ; U11.3 69.518,47.001 v3(69.617,47.101)
  Mid-Layer 1 w0.3: v3(66.477,45.491) 68.007,45.491 v3(69.617,47.101)
U11_5: pad.1@66.257,50.551 U11.5 | length 3.4
  Top Layer w0.3: U11.5 65.907,47.501 v1(66.427,48.021)
  Bottom Layer w0.254: pad.1@66.257,50.551 66.257,48.191 v1@66.427,48.021
USB1_A5: R8.1 USB1.A5 | length 4.8
  Top Layer w0.254: R8.1@73.645,50.479 73.757,50.366 73.757,47.381 74.389,46.749 USB1.A5
USB1_A8: USB1.A8
USB1_B5: R9.2 USB1.B5 | length 5.2
  Top Layer w0.254: USB1.B5 76.486,49.749 77.477,50.741 R9.2
USB1_B8: USB1.B8
VBUS: C8.1 C11.1 D1.1 H2.1 Q1.2 U3.3 U3.4 U4.3 U4.4 | length 18.7
  Top Layer w0.254: Q1.2@70.282,46.221 Q1.2 ; 70.572,50.3 U3.3@70.572,50.681
  Top Layer w0.3: 69.168,50.3 U4.3 ; 69.818,50.336 U4.4 ; 71.222,50.3 U3.4@71.222,50.681
  Top Layer w0.4: 69.168,50.3 71.222,50.3 71.222,49.434 C8.1 70.328,49.229 C11.1@70.316,49.216 ; 69.818,50.336 70.345,49.809 C11.1 ; Q1.2@70.257,46.222 70.257,46.561 ; 70.283,46.56 70.57,46.847 v2(70.57,47.706) 70.875,48.01 70.875,49.229
  Mid-Layer 2 w0.4: H2.1 70.57,42.651 v2(70.57,47.706)
VUSB: C14.1 D1.2 pad.1@80.195,49.601 Q1.1 R1.2 U10.3 USB1.A4B9 USB1.B4A9 | length 29.4
  Top Layer w0.3: U10.3 66.518,41.431 v2(67.037,40.911)
  Top Layer w0.4: 70.917,46.221 71.122,46.221 71.37,46.469 R1.2@71.871,46.466 ; R1.2 71.955,46.551 C14.1@73.257,46.551 ; D1.2 72.97,46.838 C14.1@73.257,46.551 ; USB1.A4B9 74.237,45.599 73.98,45.856 73.98,46.076 73.505,46.551 C14.1@73.257,46.551
  Mid-Layer 2 w0.4: v2@72.181,40.495 72.981,41.277 v2@72.981,47.658
  Bottom Layer w0.35: v2(67.037,40.911) 67.037,41.101 67.557,41.621 71.055,41.621 v2(72.18,40.496)
  Bottom Layer w0.4: v2(72.981,47.657) 75.124,49.801 ; v2(75.124,50.399) 75.124,49.801 ; pad.1@80.195,49.601 79.995,49.801 75.124,49.801
pads on no net: 2.P$1 2.P$2 U1.9 USB1.

## Polygon pours and split planes (outlines as drawn)
GND on Bottom Layer (solid): 38.257,38.789 38.307,57.159 75.328,57.311 75.328,53.201 80.52,53.226 81.347,52.229 81.297,48.549 81.277,43.819 78.967,38.759 38.257,38.789
3V3 on Mid-Layer 2 (solid): 74.248,38.801 74.237,39.861 74.237,57.279 38.337,57.229 38.257,38.809
GND on Mid-Layer 1 (solid): 78.967,38.759 38.237,38.799 38.287,57.169 75.328,57.311 75.328,53.191 80.34,53.216 81.257,52.169 81.407,47.969 81.227,43.669 79.107,41.419
GND on Top Layer (solid): 75.33,57.316 38.257,57.209 38.237,38.769 78.977,38.759 79.047,41.429 81.297,43.669 81.307,52.349 80.42,53.236 75.367,53.161

## Keep-outs
Keep-Out Layer:
  lines w0.254: 38.227,40.349 ccw(c39.827,40.349) 39.827,38.749 ; 38.227,55.649 cw(c39.827,55.649) 39.827,57.249 ; 77.427,38.749 ccw(c77.427,40.349) 79.027,40.349
  lines w0.254 net S$134937: 77.427,57.249 cw(c77.427,55.649) 79.027,55.649

## Silkscreen, mask and mechanical layers (free items; w line width, h text height)
Top Overlay:
  circle w0.2: c45.146,42.476 r0.677
  lines w0.2: 45.146,41.536 45.146,42.095 ; 45.17,41.561 45.246,41.637 45.424,41.815 45.216,42.026 45.17,42.069
  lines w0.254: 43.326,42.487 43.58,42.741 ; 43.326,42.488 43.58,42.234 ; 43.605,42.208 43.605,42.766
  lines w0.254 net S$142615: 43.605,42.488 44.405,42.491
  lines w0.254 net S$142617: 45.145,43.211 45.145,44.125 45.147,44.126 ; 44.892,43.873 45.4,43.873 45.146,44.127 44.892,43.873
  text "MI" at 46.28,57.036 h1.1 r270
  text "3V3" at 74.32,57.026 h1.1 r270
  text "SCK" at 43.78,56.976 h1.1 r270
  text "MO" at 48.77,56.946 h1.1 r270
  text "A2" at 61.51,56.936 h1.1 r270
  text "A1" at 64.18,56.886 h1.1 r270
  text "ARF" at 68.98,56.886 h1.1 r270
  text "A3" at 58.95,56.866 h1.1 r269
  text "RX" at 53.81,56.846 h1.1 r270
  text "A4" at 56.38,56.856 h1.1 r270
  text "TX" at 51.38,56.806 h1.1 r270
  text "A0" at 66.58,56.776 h1.1 r269
  text "G" at 71.69,56.706 h1.1 r92
  text "D14" at 41.805,54.521 h1.1 r270
  text "PWR" at 44.628,53.801 h1.1
  text "BATT" at 47.518,53.611 h1.1
  text "SAMD21 M0+" at 50.25,53.466 h0.7
  text "8MB" at 50.24,52.516 h0.7
  text "X" at 45.506,43.871 h0.8 r180
  text "RST" at 41.825,42.941 h1.1 r270
  text "Z" at 45.356,42.581 h0.7
  text "Y" at 42.612,42.505 h0.8 r201
  text "D13" at 46.186,41.401 h1.1
  text "PRO" at 56.03,40.846 h0.7
  text "SDA" at 58.97,40.766 h1.1 r270
  text "SCL" at 61.58,40.606 h1.1 r270
  text "RST" at 66.5,40.616 h1.1 r270
  text "VIN" at 68.96,40.586 h1.1 r270
  text "12" at 51.4,40.046 h1.1 r270
  text "10" at 48.85,40.036 h1.1 r269
  text "11" at 46.21,39.866 h1.1 r270
  text "G" at 63.92,39.786 h1.1 r92
  text "2" at 43.56,39.606 h1.1 r90
  text "6" at 53.9,39.436 h1.1 r92
  text "7" at 56.4,39.396 h1.1 r90
Bottom Overlay:
  lines w0.1 net S$89916: 61.335,52.301 61.325,46.221 63.807,46.219 64.137,46.549 64.135,52.311
  lines w0.1 net S$89918: 61.335,52.311 64.125,52.311
  text "RX/0" at 52.23,54.806 h1.1 r178
  text "TX/1" at 49.53,54.696 h1.1 r178
  text "ARF" at 67.503,54.693 h1.1 r180
  text "A4" at 55.489,54.667 h1.1 r180
  text "A2" at 60.34,54.667 h1.1 r180
  text "MO" at 44.69,54.644 h1.1 r180
  text "A3" at 57.8,54.642 h1.1 r181
  text "A0" at 65.065,54.642 h1.1 r181
  text "3V3" at 72.565,54.601 h1.1 r180
  text "GND" at 69.845,54.561 h1.1 r179
  text "MI" at 47.408,54.543 h1.1 r180
  text "A1" at 62.271,54.54 h1.1 r180
  text "SCK" at 41.999,54.517 h1.1 r180
  text "V" at 63.087,51.601 h1.1 r252
  text "DIO" at 63.167,49.571 h1.1 r270
  text "CLK" at 63.077,47.321 h1.1 r269
  text "G" at 63.057,46.381 h1.1 r268
  text "GND VBUS" at 78.005,46.101 h0.7 r270
  text "IMU: 0x28" at 67.677,45.391 h1.5 r270
  text "BME280: 0x77" at 69.037,44.211 h1.5 r270
  text "APDS9960: 0x39" at 70.427,43.531 h1.5 r270
  text "LIPO GAUGE: 0x36" at 66.527,42.901 h1.5 r270
  text "48MHz / 8MB / 3.3V" at 71.777,42.571 h1.5 r270
  text "LIPO BATT" at 70.297,42.521 h1.1 r180
  text "ATSAMD2G18" at 72.927,42.511 h2 r270
  text "11" at 44.918,42.397 h1.1 r180
  text "RST" at 65.25,42.356 h1.1 r180
  text "GND" at 62.18,42.316 h1.1 r179
  text "4" at 42.71,42.296 h1.1 r212
  text "10" at 47.56,42.296 h1.1 r181
  text "VIN" at 67.57,42.276 h1.1 r180
  text "6" at 52.995,42.245 h1.1 r178
  text "7" at 55.561,42.245 h1.1 r180
  text "SCL" at 60.057,42.245 h1.1 r180
  text "12" at 50.024,42.22 h1.1 r180
  text "SDA" at 57.39,42.22 h1.1 r180
  text "3.7/4.2v" at 70.475,41.607 h1.1 r178